# EAGLE board counter_shield (EAGLE 6.4)
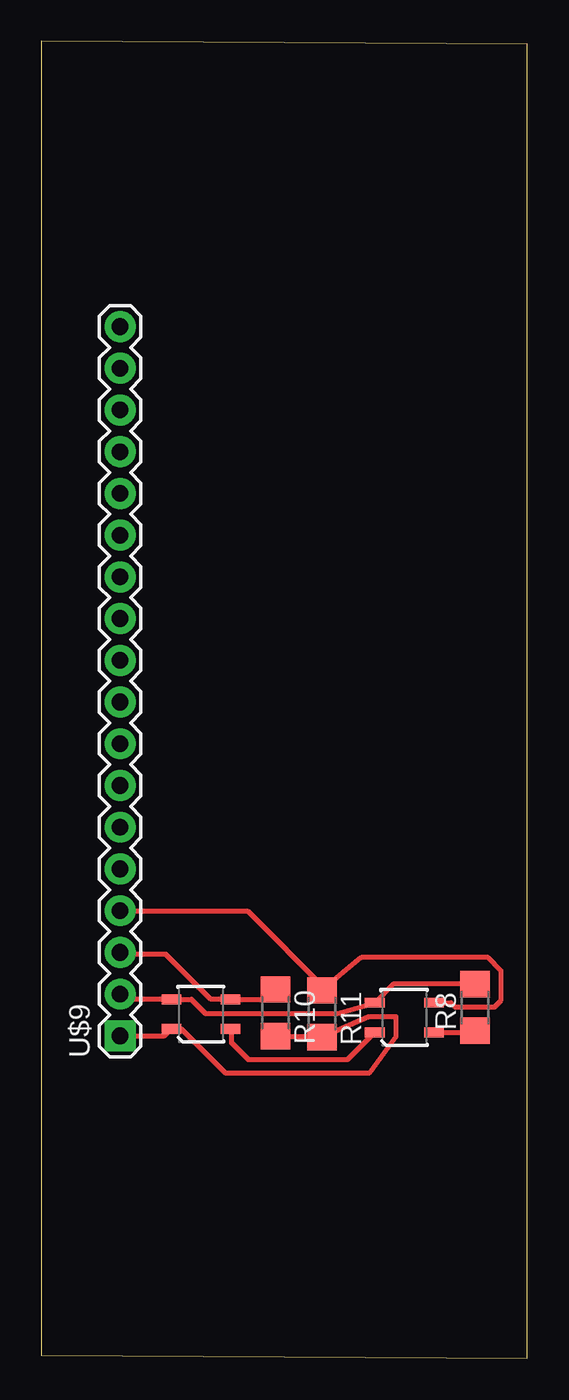
[diagram p0: board, top side]

Size 29.6 x 80.2 mm. Coordinates in mm from the lower left corner, seen from the top.
Outline: 0,0.2 29.6,0 29.6,80 0,80.2 0,0.2
Copper layers (1*16): Top 0.035mm / dielectric 1.5mm / Bottom 0.035mm
Design rules "default": minimum track width 10mil, minimum drill 24mil, track to track 8mil, track to pad 8mil, pad to pad 8mil, via to via 8mil, smd to smd 8mil, copper to edge 40mil, drill to drill 8mil, minimum pad ring 10mil, minimum via ring 8mil, stop-mask expansion 4mil, vias tented up to drill 0mil, thermal gap 10mil

## Footprints (pad centres in the part's own frame; a part is rotated, then mirrored left to right if it is on the bottom)
1206 = smd 1.6 x 1.803: 1 -1.422,0; 2 1.422,0
QRE1113 = smd 1.2 x 0.6: 1 -1.8,-0.9; 2 1.8,-0.9; 3 1.8,0.9; 4 -1.8,0.9
1X18 = drill 1.016 pad 1.88 square: 1 0,0 | drill 1.016 pad 1.88: 2 2.54,0; 3 5.08,0; 4 7.62,0; 5 10.16,0; 6 12.7,0; 7 15.24,0; 8 17.78,0; 9 20.32,0; 10 22.86,0; 11 25.4,0; 12 27.94,0; 13 30.48,0; 14 33.02,0; 15 35.56,0; 16 38.1,0; 17 40.64,0; 18 43.18,0

## Placement (x,y rotation side)
R8  100  [1206]  26.41,21.37 90 top
R10  10k  [1206]  14.27,21.04 270 top
R11  10k  [1206]  17.09,20.98 270 top
U$6  QRE1113  [QRE1113]  22.11,20.76 0 top
U$7  QRE1113  [QRE1113]  9.73,20.96 0 top
U$9  M18_  [1X18]  4.81,19.64 90 top

## Library data of the parts
R8 R10 R11 = 01_ng
U$6 U$7 = SparkFun-Sensors
U$9 = SparkFun-Connectors

## Nets
GND: R8.2 U$6.4 U$7.4 U$9.2
N$10: R8.1 U$6.2
N$11: U$6.1 U$7.2
N$12: R10.1 U$7.3 U$9.3
N$13: R11.1 U$6.3 U$9.4
VCC: R10.2 R11.2 U$7.1 U$9.1

## Tracks (layer width: path | path; a pad name or v marks a point on that pad's centre or on a via)
GND
  Top 0.3: 5.13,21.86 U$7.4 9.14,21.86 10,21 18.05,21 U$6.4 21.44,22.79 R8.2
  Top 0.406: 5.13,21.86 U$9.2
N$10
  Top 0.3: U$6.2 26.32,19.86 R8.1
N$11
  Top 0.3: U$6.1 18.65,18.2 12.6,18.2 11.6,19.2 11.6,19.99 U$7.2
N$12
  Top 0.3: R10.1 13.47,21.86 U$7.3 10.34,21.86 7.6,24.6 4.93,24.6 U$9.3
N$13
  Top 0.3: U$6.3 24.94,21.66 25.2,21.4 27.6,21.4 28,21.8 28,23.6 27.2,24.4 19.49,24.4 R11.1 17.4,22.4 12.6,27.2 4.87,27.2 U$9.4
VCC
  Top 0.3: U$9.1 7.51,19.64 U$7.1 8.54,20.06 11.2,17.4 20,17.4 21.6,19.6 21.6,20.8 19.93,20.8 R11.2 17.43,19.62 R10.2